# Altium PCB (OLD) BP and Sensors.PcbDoc
Units mm, origin at the board's own origin, x right, y up, seen from the top; angles counter-clockwise.
Board outline 99.2 x 114.2 mm, 2 copper layers (Top Layer, Bottom Layer); 83 components, 122 nets, 285 pads, 3 vias.
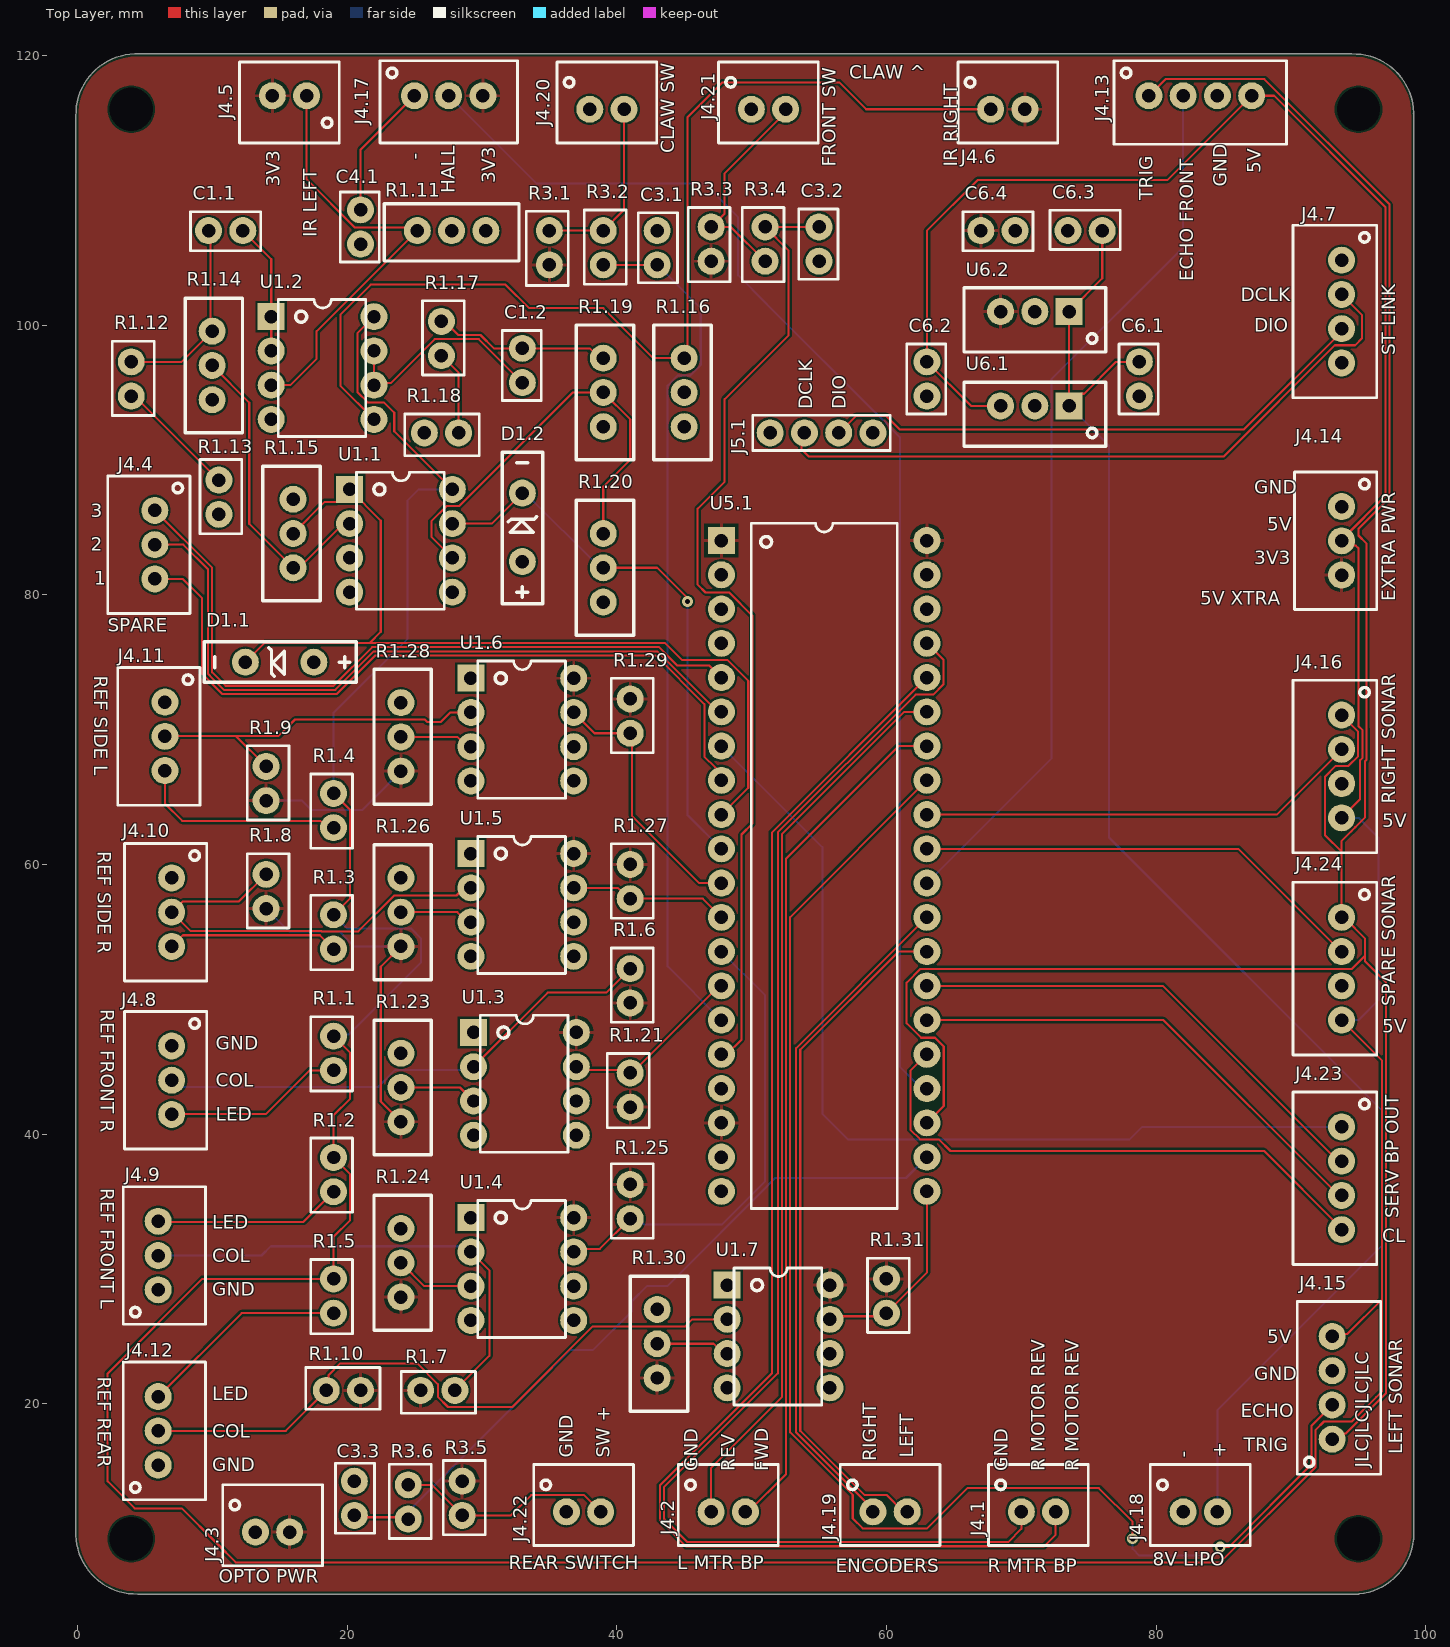
[diagram p0: Top Layer view]
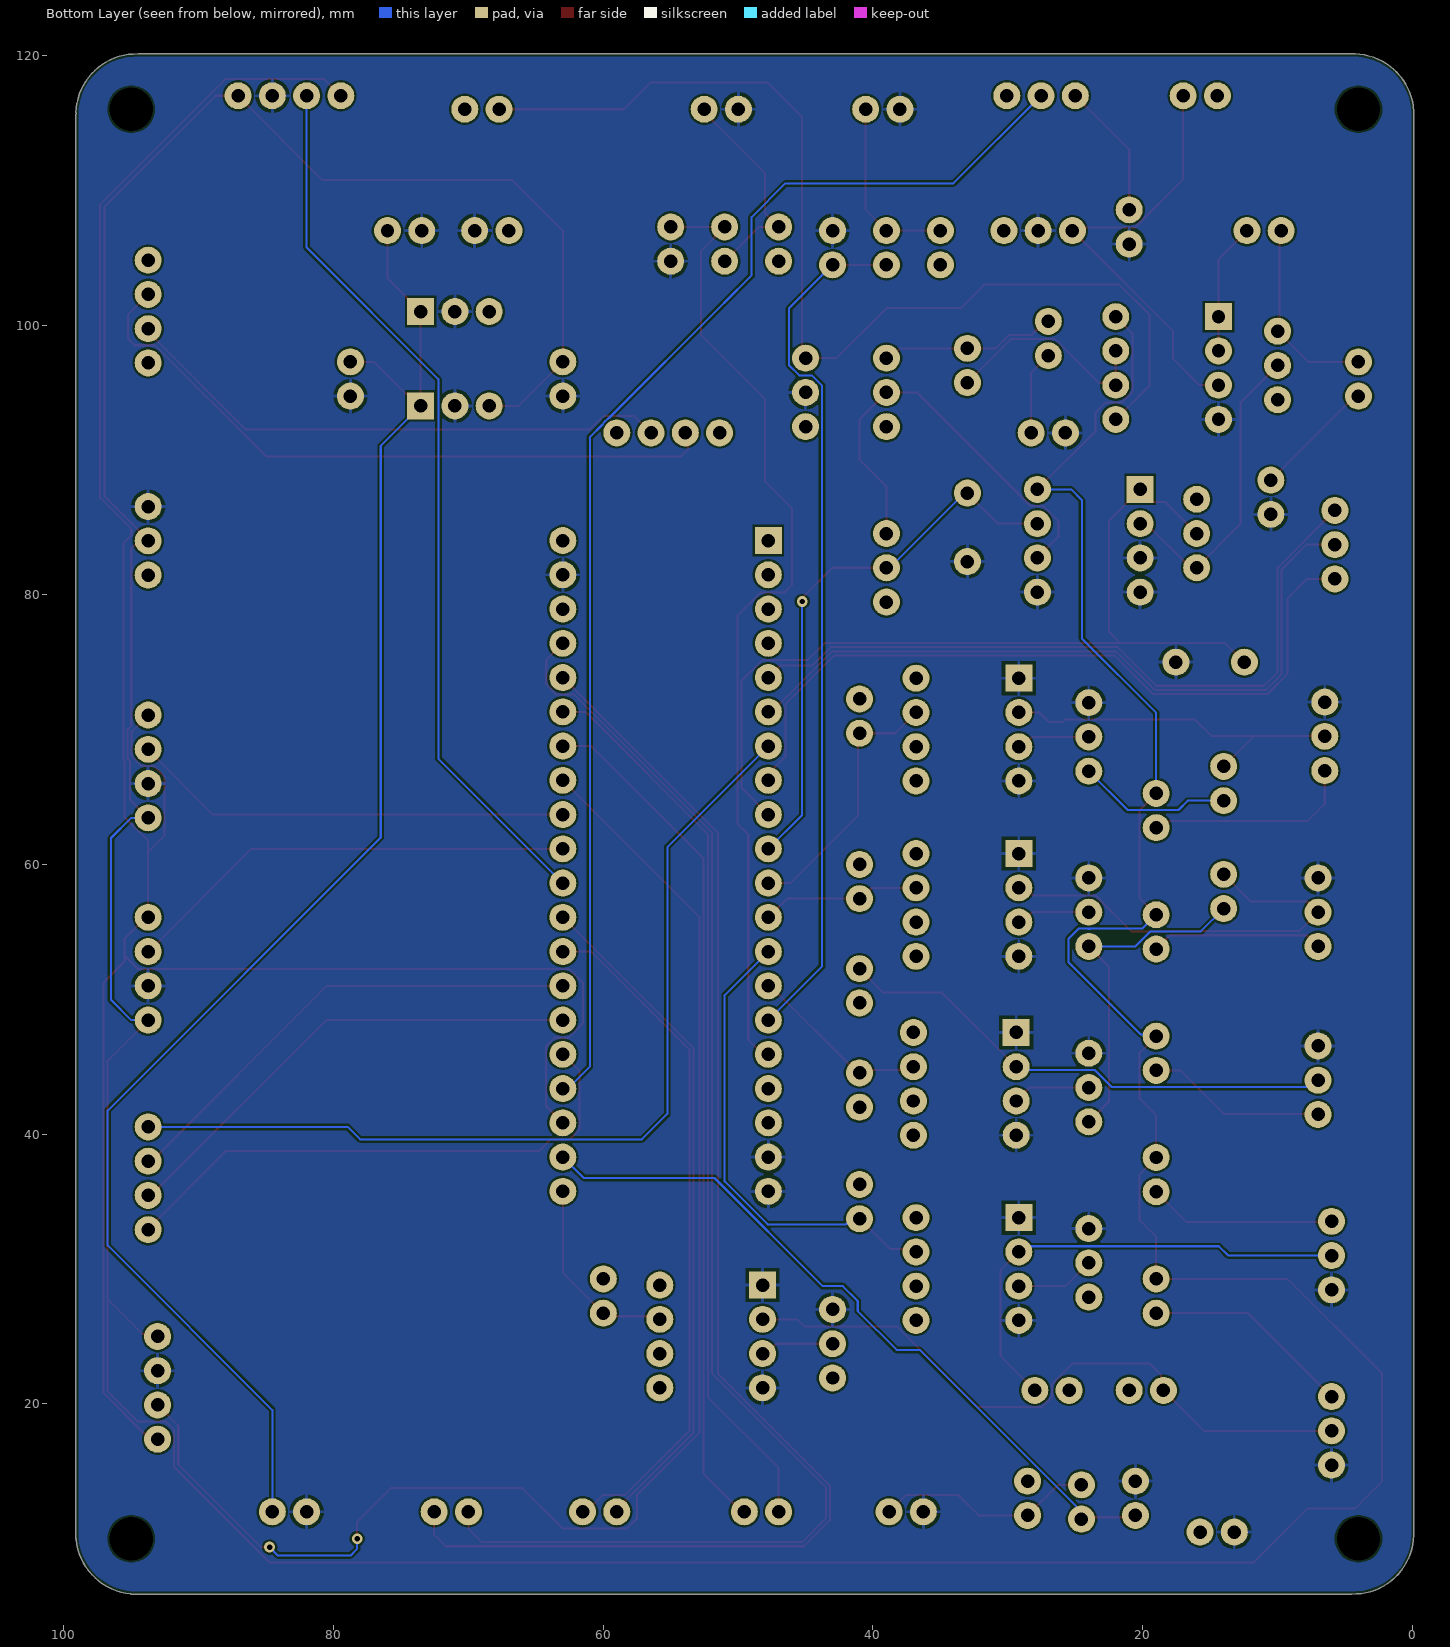
[diagram p1: Bottom Layer view, seen from below]

## Layer stack, top to bottom
Top Solder: solder mask 0.0102, Solder Resist, Dk 3.5
Top Layer: signal copper 0.0356
Dielectric 1: dielectric 0.32, FR-4, Dk 4.8
Bottom Layer: signal copper 0.0356
Bottom Solder: solder mask 0.0102, Solder Resist, Dk 3.5

## Board outline
-0.1,10.247 cw(c0,10.25) -0.1,10.25 -0.1,115.498 cw(c4.375,115.625) 4.247,120.1 cw(c4.25,120) 4.25,120.1 94.499,120.1 cw(c94.625,115.625) 99.1,115.753 cw(c99,115.75) 99.1,115.75 cw(c99,115.75) 99.079,115.688 cw(c99,115.625) 99.1,115.625 99.1,10.501 ccw(c94.625,10.375) 99.1,10.503 99.1,10.501 cw(c94.625,10.375) 99.102,10.375 cw(c94.625,10.375) 99.1,10.249 99.1,10 cw(c99,10) 99.081,9.941 cw(c94.625,10.375) 95.059,5.919 cw(c95,6) 95,5.9 4.501,5.9 ccw(c4.375,10.375) 4.503,5.9 4.501,5.9 cw(c4.375,10.375)

## Design rules (kind name [scope] priority, off if disabled: settings)
BoardOutlineClearance [All] p1: gap=0.2 ignorepadtopadclearanceinfootprint=FALSE
Clearance [All] p1: gap=0.152 ignorepadtopadclearanceinfootprint=FALSE
HoleSize [All] p1: absolutevalues=TRUE maxlimit=100 minlimit=0.4 maxpercent=80.000 minpercent=20.000
PolygonConnect [All] p1: connectstyle=Relief reliefconductorwidth=0.254 reliefentries=4 polygonreliefangle="90 Angle" airgapwidth=0.254
RoutingVias [All] p1: holewidth=0.4 width=0.8 viastyle="Through Hole" minholewidth=0.4 minwidth=0.6 maxholewidth=100 maxwidth=100
SilkToSilkClearance [All] p1: silktosilkclearance=0
SilkToSolderMaskClearance [IsPad] p1: minsilkscreentomaskgap=0 clearancetoexposedcopper=TRUE
SolderMaskExpansion [All] p1: expansion=0.102 istentingtop=FALSE
Width [All] p1: maxlimit=100 minlimit=0.152 preferedwidth=0.152
27 further rules are at their usual default settings.

## Components (designator, comment, footprint, x,y, rotation, side; value= is the part's Value field where it differs from the comment)
C1.1 "470n" "Non Polarized Cap" 11,107 r180 top
C1.2 "470n" "Non Polarized Cap" 33,97 r90 top
C3.1 "100n" "Non Polarized Cap" 43,105.73 r270 top
C3.2 "100n" "Non Polarized Cap" 55,106 r90 top
C3.3 "100n" "Non Polarized Cap" 20.54,13 r270 top
C4.1 "10n" "Non Polarized Cap" 21,107.27 r90 top
C6.1 "470n" "Non Polarized Cap" 78.75,96 r90 top
C6.2 "100n" "Non Polarized Cap" 63,96 r90 top
C6.3 "470n" "Non Polarized Cap" 74.73,107 r0 top
C6.4 "100n" "Non Polarized Cap" 68.27,107 r180 top
D1.1 "3.3V" "Zener Generic" 15,75 r180 top
D1.2 "3.3V" "Zener Generic" 33,85 r90 top
J4.1 "Right Motor BP" "2pos JST" 71.27,12 r0 top
J4.2 "Right Motor BP" "2pos JST" 48.27,12 r0 top
J4.3 "Optocoupler Power, Gnd" "2pos JST" 14.48,10.5 r0 top
J4.4 "Spare BP Pins" "3pos JST" 5.75,83.71 r270 top
J4.5 "IR Left" "2pos JST" 15.73,117 r180 top
J4.6 "IR Right" "2pos JST" 69,116 r0 top
J4.7 "SWD BP" "4Pos JST" 93.75,101 r270 top
J4.8 "Front Right Reflectance" "3pos JST" 7,44 r270 top
J4.9 "Front Left Reflectance" "3pos JST" 6,31 r90 top
J4.10 "Side Right Reflectance" "3pos JST" 7,56.46 r270 top
J4.11 "Side Left Reflectance" "3pos JST" 6.5,69.5 r270 top
J4.12 "Rear Reflectance" "3pos JST" 6,18 r90 top
J4.13 "Sonar Front Middle" "4Pos JST" 83.27,117 r0 top
J4.14 "Extra Power" "3pos JST" 93.75,84 r270 top
J4.15 "Sonar Side Left" "4Pos JST" 93.05,21.19 r90 top
J4.16 "Sonar Side Right" "4Pos JST" 93.75,67.27 r270 top
J4.17 "Magnet Sensor" "3pos JST" 27.54,117 r0 top
J4.18 "8V Lipo" "2pos JST" 83.27,12 r0 top
J4.19 "Encoders" "2pos JST" 60.27,12 r0 top
J4.20 "Claw Microswitch" "2pos JST" 39.27,116 r0 top
J4.21 "Front Microswitch" "2pos JST" 51.25,116 r0 top
J4.22 "Rear Microswitch" "2pos JST" 37.54,12 r0 top
J4.23 "Servos" "4Pos JST" 93.75,36.73 r270 top
J4.24 "Sonar Spare" "4Pos JST" 93.75,52.27 r270 top
J5.1 "Debug" "Four Pads" 55.19,92 r180 top
R1.1 "100" Res_Generic 19,46 r270 top
R1.2 "100" Res_Generic 19,37 r270 top
R1.3 "100" Res_Generic 19,55 r270 top
R1.4 "100" Res_Generic 19,64 r270 top
R1.5 "100" Res_Generic 19,28 r270 top
R1.6 "47k" Res_Generic 41,51 r90 top
R1.7 "47k" Res_Generic 26.73,21 r0 top
R1.8 "47k" Res_Generic 14,58 r90 top
R1.9 "47k" Res_Generic 14,66 r90 top
R1.10 "47k" Res_Generic 19.73,21 r180 top
R1.11 "100k" "Pot Generic" 27.75,107 r180 top
R1.12 "100" Res_Generic 4,96 r90 top
R1.13 "100" Res_Generic 10.5,87.23 r90 top
R1.14 "10k" "Pot Generic" 10,97 r270 top
R1.15 "100k" "Pot Generic" 16,84.54 r90 top
R1.16 "100k" "Pot Generic" 45,95 r90 top
R1.17 "100" Res_Generic 27,99 r90 top
R1.18 "100" Res_Generic 27,92 r0 top
R1.19 "10k" "Pot Generic" 39,95 r270 top
R1.20 "100k" "Pot Generic" 39,82 r270 top
R1.21 "10k" Res_Generic 41,43.27 r270 top
R1.23 "10k" "Pot Generic" 24,43.46 r270 top
R1.24 "10k" "Pot Generic" 24,30.46 r270 top
R1.25 "10k" Res_Generic 41,35 r90 top
R1.26 "10k" "Pot Generic" 24,56.46 r270 top
R1.27 "10k" Res_Generic 41,58.73 r90 top
R1.28 "10k" "Pot Generic" 24,69.46 r270 top
R1.29 "10k" Res_Generic 41,71 r90 top
R1.30 "10k" "Pot Generic" 43,24.46 r270 top
R1.31 "10k" Res_Generic 60,28 r90 top
R3.1 "10k" Res_Generic 35,105.73 r270 top
R3.2 "1k" Res_Generic 39,105.73 r90 top
R3.3 "10k" Res_Generic 47,106 r270 top
R3.4 "1k" Res_Generic 51,106 r270 top
R3.5 "10k" Res_Generic 28.54,13 r90 top
R3.6 "1k" Res_Generic 24.54,12.73 r90 top
U1.1 "TL082IP" DIP8 24,84 r0 top
U1.2 "TL082IP" DIP8 18.19,96.81 r0 top
U1.3 "LM311" DIP8 33.19,43.73 r0 top
U1.4 "LM311" DIP8 33,30 r0 top
U1.5 "LM311" DIP8 33,57 r0 top
U1.6 "LM311" DIP8 33,70 r0 top
U1.7 "LM311" DIP8 52,25 r0 top
U5.1 "Bluepill" DIP40 55.38,59.89 r0 top
U6.1 "5V XTRA" TO220 71,94 r180 top
U6.2 "UA78M33" TO220 71,101 r180 top

## Footprints (in the part's own frame and the unit in brackets; to place one, negate y for a bottom-side part, rotate by r counter-clockwise, add the part's x,y. Pads: shape width x height; smd on the part's side, far side on the other; paste and mask are expansions set on the pad)
"2pos JST" [mm]
  round 2 hole 1: 1(-1.27,0) 2(1.27,0)
  silkscreen extent -3.7,-2.5 3.7,3.5, body extent -3.7,-2.4 3.7,3.35, height 7.01
"3pos JST" [mm]
  round 2 hole 1: 1(-2.54,0) 2(0,0) 3(2.54,0)
  silkscreen extent -5.1,-3.5 5.1,2.6, body extent -4.95,-3.35 4.95,2.4, height 7
"4Pos JST" [mm]
  round 2 hole 1: 1(-3.81,0) 2(-1.27,0) 3(1.27,0) 4(3.81,0)
  silkscreen extent -6.4,-3.6 6.4,2.6, body extent -6.2,-3.38 6.2,2.37, height 7.01
DIP8 [mm]
  rect 2x2 hole 1: 1(-3.81,3.81)
  round 2 hole 1: 2(-3.81,1.27) 3(-3.81,-1.27) 4(-3.81,-3.81) 5(3.81,-3.81) 6(3.81,-1.27) 7(3.81,1.27) 8(3.81,3.81)
  silkscreen extent -3.3,-5.08 3.2,5.08, body extent -3.96,-4.79 3.91,4.79, height 5.33
DIP40 [mm]
  rect 2x2 hole 1: 1(-7.62,24.13)
  round 2 hole 1: 2(-7.62,21.59) 3(-7.62,19.05) 4(-7.62,16.51) 5(-7.62,13.97) 6(-7.62,11.43) 7(-7.62,8.89) 8(-7.62,6.35) 9(-7.62,3.81) 10(-7.62,1.27) 11(-7.62,-1.27) 12(-7.62,-3.81) 13(-7.62,-6.35) 14(-7.62,-8.89) 15(-7.62,-11.43) 16(-7.62,-13.97) 17(-7.62,-16.51) 18(-7.62,-19.05) 19(-7.62,-21.59) 20(-7.62,-24.13) 21(7.62,-24.13) 22(7.62,-21.59) 23(7.62,-19.05) 24(7.62,-16.51) 25(7.62,-13.97) 26(7.62,-11.43) 27(7.62,-8.89) 28(7.62,-6.35) 29(7.62,-3.81) 30(7.62,-1.27) 31(7.62,1.27) 32(7.62,3.81) 33(7.62,6.35) 34(7.62,8.89) 35(7.62,11.43) 36(7.62,13.97) 37(7.62,16.51) 38(7.62,19.05) 39(7.62,21.59) 40(7.62,24.13)
  silkscreen extent -5.42,-25.4 5.42,25.4, body extent -8.7,-25.67 8.8,25.63, height 4.71
"Four Pads" [mm]
  round 2 hole 1: 1(-3.81,0) 2(-1.27,0) 3(1.27,0) 4(3.81,0)
  silkscreen extent -5.1,-1.3 5.1,1.3
"Non Polarized Cap" [mm] "Cap Generic THT"
  round 2 hole 1: 1(-1.27,0) 2(1.27,0)
  silkscreen extent -2.6,-1.4 2.6,1.5, body extent -2,-1.2 2,1.3, height 6
"Pot Generic" [mm]
  round 2 hole 1: 1(-2.54,0) 2(0,0) 3(2.54,0)
  silkscreen extent -5,-2 5,2.25, body extent -4.89,-1.86 4.89,2.15, height 11.41
Res_Generic [mm] "Cap Generic THT Footprint"
  round 2 hole 1: 1(-1.27,0) 2(1.27,0)
  silkscreen extent -2.71,-1.7 2.8,1.4, body extent -1.47,-1.3 2.4,1, height 8.18
TO220 [mm]
  rect 2x2 hole 1: 1(-2.54,0)
  round 2 hole 1: 2(0,0) 3(2.54,0)
  silkscreen extent -5.25,-1.75 5.25,3, body extent -5.08,-1.66 5.08,2.91, height 19.6
"Zener Generic" [mm]
  round 2 hole 1: 1(-2.54,0) 2(2.54,0)
  silkscreen extent -5.68,-1.5 5.58,1.5, body extent -3.12,-1.86 4.37,1.86, height 11.55

## Part data
C1.1 C1.2 C3.1 C3.2 C3.3 C4.1 C6.1 C6.2 C6.3 C6.4: library part Cap_Generic
D1.1 D1.2: library part Zener_Generic
J4.1 J4.2 J4.3 J4.5 J4.6 J4.18 J4.19 J4.20 J4.21 J4.22: library part "2pos Conn", "2pos Conn JST"
J4.4 J4.8 J4.9 J4.10 J4.11 J4.12 J4.14 J4.17: library part "3pos Conn", "3pos Conn"
J4.7 J4.13 J4.15 J4.16 J4.23 J4.24: library part "4pos Conn", "4pos Conn"
J5.1: library part "BP SWD Conn"
R1.1 R1.2 R1.3 R1.4 R1.5 R1.6 R1.7 R1.8 R1.9 R1.10 R1.12 R1.13 R1.17 R1.18 R1.21 R1.25 R1.27 R1.29 R1.31 R3.1 R3.2 R3.3 R3.4 R3.5 R3.6: library part Res_Generic
R1.11 R1.14 R1.15 R1.16 R1.19 R1.20 R1.23 R1.24 R1.26 R1.28 R1.30: library part Pot_Generic
U1.1 U1.2: library part "TL082IP Op Amp", "TL082IP IC OPAMP JFET 2 CIRCUIT 8DIP", Supplier Part Number 1=595-TL082IP, Supplier 1=Mouser
U1.3 U1.4 U1.5 U1.6 U1.7: library part "LM311 Comparator", "LM311 IC DIFF COMPARATOR STROBE 8-DIP", Supplier Part Number 1=595-LM311P, Supplier 1=Mouser
U5.1: "STM32F103C8T6"
U6.1: library part "UA7805 5V Reg", "UA7805 IC REG LINEAR 5V 1.5A TO220-3", Supplier Part Number 1=296-39515-5-ND, Supplier 1=Digi-Key
U6.2: library part "UA78M33CKCS 3.3V Reg", "UA78M33 IC REG LINEAR 3.3V 500MA TO220-3", Supplier Part Number 1=595-UA78M33CKCS, Supplier 1=Mouser

## Free pads (board coordinates)
  round 0 hole 3.2: ""(4,10) ""(4,116) ""(95,10) ""(95,116)

## Via types
v1: diameter 0.8, hole 0.4, Top Layer to Bottom Layer, tented both sides, 3 vias

## Nets (pads, with @x,y where several pads share a name; then routed paths per layer and width w, separated by ;. In a path a pad name is that pad's centre, name@x,y a point inside that pad or via, vN(x,y) a via of type N, cw(c..) or ccw(c..) an arc to the next point about the centre after c; other vN are vias at no path point)
3.3V_P: C6.4.2 J4.3.2 J4.5.2 J4.6.2 J4.14.3 J4.17.3 R1.6.1 R1.7.1 R1.8.1 R1.9.1 R1.10.1 R1.21.2 R1.23.3 R1.24.3 R1.25.2 R1.26.3 R1.27.2 R1.28.3 R1.29.2 R1.30.3 R1.31.2 R3.1.2 R3.3.2 R3.5.2 U1.3.8 U1.4.8 U1.5.8 U1.6.8 U1.7.8 U5.1.1 U5.1.18 U5.1.40 U6.2.3 | length 36.9
  Top Layer w0.152: R1.23.3 22.5,42.42 22.5,52.42 R1.26.3
  Bottom Layer w0.152: R1.8.1 15.689,55.041 19.426,55.041 20.548,53.92 R1.26.3 ; R1.9.1 16.66,64.73 17.349,64.041 21.121,64.041 R1.28.3
5V_ARM: 
5V_P: C6.2.2 J4.13.4 J4.14.2 J4.15.4 J4.16.4 J4.24.4 R1.1.1 R1.2.1 R1.3.1 R1.4.1 R1.5.1 U1.1.8 U1.2.8 U6.1.3 | length 383.5
  Top Layer w0.152: R1.1.1 20.229,46.041 20.229,42.619 19,41.39 R1.2.1 20.229,37.041 20.229,33.619 19,32.39 R1.5.1 9.27,29.27 2.25,22.25 2.25,14.25 4.25,12.25 7.75,12.25 10.355,9.645 11.75,8.25 84.75,8.25 91.821,15.321 91.821,18.071 92.441,18.691 94.51,18.691 96.319,20.5 96.75,20.931 96.75,27.75 ; R1.3.1 20.229,57.499 20.229,64.041 R1.4.1 ; U1.2.8 20.771,99.391 20.771,95.031 21.537,94.266 22.734,94.266 23.5,93.5 23.5,92.12 U1.1.8 ; U6.1.3 66.27,94 C6.2.2 63,107 66.75,110.75 80.83,110.75 J4.13.4 88.75,117 97,108.75 97,87.319 J4.14.2@93.966,84.284 ; J4.15.4@92.582,25.189 94.189,25.189 96.75,27.75 ; J4.24.4 93.75,48.457 96.75,45.457 96.75,27.75 ; J4.16.4 95.106,64.816 95.106,67.71 95.283,67.887 95.283,69.978 95,70.261 95,83.45 94.803,83.646 94.603,83.646 J4.14.2@93.966,84.284 ; J4.14.2@93.75,84.7 93.75,84.5 J4.14.2@93.966,84.284 ; J4.14.2@93.812,83.95 93.966,84.103 J4.14.2@93.966,84.284
  Bottom Layer w0.152: R1.1.1 19.119,47.389 20.139,47.389 25.5,52.75 25.5,54.5 24.75,55.25 24.213,55.25 cw(c24,56.46) 23.787,55.25 20.02,55.25 R1.3.1 ; R1.4.1 19,71.25 24.5,76.75 24.5,87 25.31,87.81 U1.1.8 ; J4.24.4 95,48.46 96.5,49.96 96.5,61.96 95,63.46 J4.16.4
5V_SERVO: 
8V: C6.1.2 C6.3.2 J4.18.2 U6.1.1 U6.2.1 | length 117.3
  Top Layer w0.152: C6.3.2 76,103.46 U6.2.1 U6.1.1 74.444,94.904 74.654,94.904 77.02,97.27 C6.1.2
  Bottom Layer w0.152: U6.1.1 76.5,91.04 76.5,62 96.75,41.75 96.75,31.75 84.54,19.54 J4.18.2
15V: 
ARM_SERV_BP_IN: 
ARM_SERV_BP_OUT: J4.23.3 U5.1.26 | length 36.1
  Top Layer w0.152: U5.1.26 80.54,48.46 93.54,35.46 J4.23.3
ARM_SERV_PWM: 
BOX_SERV_BP_IN: 
BOX_SERV_BP_OUT: J4.23.1 U5.1.7 | length 69.8
  Bottom Layer w0.152: U5.1.7 55.25,61.29 55.25,41.5 57.139,39.611 78.031,39.611 78.96,40.54 J4.23.1@93.5,40.54
BOX_SERV_PWM: 
BRIDGE_SERV_BP_IN: 
BRIDGE_SERV_BP_OUT: J4.23.2 U5.1.27 | length 36.1
  Top Layer w0.152: U5.1.27 80.5,51 93.5,38 J4.23.2
BRIDGE_SERV_PWM: 
CLAW_SERV_BP_IN: 
CLAW_SERV_BP_OUT: J4.23.4 U5.1.25 | length 41.2
  Top Layer w0.152: U5.1.25 61.771,44.691 61.771,40.331 62.491,39.611 63.889,39.611 64.75,38.75 88,38.75 93.75,33 J4.23.4
CLAW_SERV_PWM: 
DCLK: J4.7.2 J5.1.3 | length 50.6
  Top Layer w0.152: J5.1.3 53.702,91.782 53.702,90.798 54.25,90.25 85,90.25 93.25,98.5 94.75,98.5 95.25,99 95.25,100.75 J4.7.2@93.75,102.25
DIO: J4.7.3 J5.1.2 | length 41.5
  Top Layer w0.152: J5.1.2 57.71,93.25 60,93.25 61,92.25 86.5,92.25 93.75,99.5 J4.7.3
ECHO_F_M: J4.13.2 U5.1.30 | length 66.3
  Bottom Layer w0.152: U5.1.30 72.229,67.849 72.229,95.979 82,105.75 J4.13.2
ECHO_S_L: J4.15.2 U5.1.33 | length 107.5
  Top Layer w0.152: U5.1.33 52.86,56.1 52.86,17.89 57.5,13.25 57.5,11.5 58.229,10.771 63.021,10.771 66,13.75 75.75,13.75 78.25,11.25 v1(78.25,10) ; v1(84.744,9.379) 84.747,9.382 85.372,9.382 91.517,15.526 91.517,18.387 J4.15.2
  Bottom Layer w0.152: v1(78.25,10) 78.25,9.25 78.747,8.753 84.118,8.753 v1(84.744,9.379)
ECHO_S_R: J4.16.2 U5.1.32 | length 32.8
  Top Layer w0.152: U5.1.32 88.95,63.7 93.75,68.5 J4.16.2
ECHO_SPARE: J4.24.2 U5.1.31 | length 33.9
  Top Layer w0.152: U5.1.31 86.09,61.16 93.71,53.54 J4.24.2
ENCODER_L: J4.19.2 U5.1.28 | length 51.1
  Top Layer w0.152: J4.19.2 61.25,12 60,13.25 58.362,13.25 53.61,18.003 53.61,46.259 60.891,53.54 U5.1.28
ENCODER_R: J4.19.1 U5.1.29 | length 50.5
  Top Layer w0.152: J4.19.1 59,12.181 53.305,17.876 53.305,46.385 U5.1.29
IR_LEFT_TRANS: J4.5.1 R1.11.3 U1.2.3 | length 32.8
  Top Layer w0.152: U1.2.3 15.79,95.54 17.75,97.5 17.75,99.54 R1.11.3 24.981,107.229 20.574,107.229 17,110.802 J4.5.1
IR_RIGHT_TRANS: J4.6.1 R1.16.3 U1.2.5 | length 79.8
  Top Layer w0.152: U1.2.5 19.5,95.5 19.5,100.75 21.75,103 31.75,103 33.5,101.25 39,101.25 42.71,97.54 R1.16.3 45.25,97.79 45.25,115.411 47.839,118 56.49,118 58.49,116 J4.6.1
IR_SNS_LEFT: D1.1.2 R1.15.2 U1.1.1 U5.1.9 | length 68
  Top Layer w0.152: D1.1.2 13.874,76.414 20.414,76.414 21.664,76.414 ; R1.15.2 18.346,86.886 19.266,86.886 U1.1.1 22.5,85.5 22.5,77.25 21.664,76.414 ; U5.1.9 49.75,65.69 49.75,73.608 48.186,75.171 44.829,75.171 43.586,76.414 21.664,76.414
IR_SNS_RIGHT: D1.2.2 R1.20.2 U1.1.7 U5.1.10 | length 41.5
  Top Layer w0.152: U1.1.7 30.73,85.27 D1.2.2 D1.2.2@33.23,87.54 ; R1.20.2 43,82 45.126,79.874 45.126,79.624 v1(45.25,79.5)
  Bottom Layer w0.152: D1.2.2 33.23,87.54 38.77,82 R1.20.2 ; v1(45.25,79.5) 45.25,63.67 U5.1.10
LEFT+: 
LEFT-: 
LEFT_FWD: 
LEFT_FWD_BP_IN: 
LEFT_FWD_BP_OUT: J4.2.2 U5.1.34 | length 63.7
  Top Layer w0.152: J4.2.2 49.75,12 52.555,14.805 52.555,60.444 60.891,68.78 U5.1.34
LEFT_REV: 
LEFT_REV_BP_IN: 
LEFT_REV_BP_OUT: J4.2.1 U5.1.35 | length 67.2
  Top Layer w0.152: J4.2.1@47,11.686 47,15.25 52.25,20.5 52.25,62.25 61.32,71.32 U5.1.35
M_GND: 
MAGNET_SNS: J4.17.2 U5.1.24 | length 95.8
  Bottom Layer w0.152: J4.17.2 34.04,110.5 46.5,110.5 49,108 49,103.681 51.047,101.634 ; 51.048,101.634 51.093,101.588 59.575,93.106 59.621,93.06 cw(c59,92) 60.06,92.621 61,91.681 61,45.009 62.629,43.38 U5.1.24
NetC1.1_1: C1.1.1 U1.2.1 U1.2.2 | length 9.8
  Top Layer w0.152: C1.1.1 14.38,104.89 U1.2.1 U1.2.2
NetC1.1_2: C1.1.2 R1.12.2 R1.14.1 | length 14.5
  Top Layer w0.152: R1.12.2 7.73,97.27 R1.14.1 9.865,99.675 9.865,106.865 C1.1.2
NetC1.2_1: C1.2.1 U1.2.6 U1.2.7 | length 16.3
  Top Layer w0.152: U1.2.7 U1.2.6 22.156,95.696 23.229,95.696 26.491,98.959 29.771,98.959 C1.2.1
NetC1.2_2: C1.2.2 R1.17.2 R1.19.1 | length 13.1
  Top Layer w0.152: R1.17.2 27.243,100.27 28.25,99.263 29.898,99.263 30.891,98.27 C1.2.2 37.992,98.27 38.722,97.54 R1.19.1
NetC4.1_2: C4.1.2 J4.17.1 | length 10.1
  Top Layer w0.152: C4.1.2 21,113 J4.17.1
NetQ2.13_1: 
NetQ2.14_1: 
NetQ2.15_1: 
NetQ2.16_1: 
NetQ2.17_1: 
NetQ2.17_3: 
NetQ2.18_1: 
NetQ2.18_3: 
NetQ2.19_1: 
NetQ2.19_3: 
NetQ2.20_1: 
NetQ2.20_3: 
NetQ2.21_1: 
NetQ2.21_3: 
NetQ2.22_1: 
NetQ2.22_3: 
NetQ2.23_1: 
NetQ2.23_3: 
NetQ2.24_1: 
NetQ2.24_3: 
NetR1.12_1: R1.12.1 R1.13.2 | length 9.1
  Top Layer w0.152: R1.12.1 4.27,94.73 R1.13.2
NetR1.14_2: R1.14.2 R1.15.1 U1.1.2 | length 23
  Top Layer w0.152: R1.14.2 12.75,94.25 12.75,85.25 R1.15.1 16.46,82 19.73,85.27 U1.1.2
NetR1.17_1: R1.17.1 R1.18.2 | length 6.3
  Top Layer w0.152: R1.17.1 28.27,96.46 R1.18.2
NetR1.19_2: R1.19.2 R1.20.1 U1.1.6 | length 32.2
  Top Layer w0.152: U1.1.6 26.25,84.29 26.25,85.447 27.384,86.581 28.319,86.581 36.738,95 R1.19.2 41,93 41,90.02 39,88.02 R1.20.1
NetR1.23_2: R1.23.2 U1.3.3 | length 5.8
  Top Layer w0.152: R1.23.2 28.38,43.46 U1.3.3
NetR1.24_2: R1.24.2 U1.4.3 | length 5.9
  Top Layer w0.152: R1.24.2 25.73,28.73 U1.4.3
NetR1.26_2: R1.26.2 U1.5.3 | length 5.5
  Top Layer w0.152: R1.26.2 28.182,56.46 28.912,55.73 U1.5.3
NetR1.28_2: R1.28.2 U1.6.3 | length 5.5
  Top Layer w0.152: R1.28.2 28.183,69.46 28.913,68.73 U1.6.3
NetR1.30_2: R1.30.2 U1.7.3 | length 5.5
  Top Layer w0.152: R1.30.2 47.182,24.46 47.912,23.73 U1.7.3
NetR2.1_2: 
NetR2.2_2: 
NetR2.3_1: 
NetR2.4_1: 
NetR2.5_2: 
NetR2.6_2: 
NetR2.9_2: 
NetR2.10_2: 
NetR2.11_1: 
NetR2.12_1: 
NetR2.13_2: 
NetR2.14_2: 
NetR2.15_2: 
NetR2.16_1: 
P_GND: C3.1.1 C3.2.1 C3.3.1 C4.1.1 C6.1.1 C6.2.1 C6.3.1 C6.4.1 D1.1.1 D1.2.1 J4.3.1 J4.8.1 J4.9.1 J4.10.1 J4.11.1 J4.12.1 J4.13.3 J4.14.1 J4.15.3 J4.16.3 J4.18.1 J4.20.1 J4.21.1 J4.22.1 J4.24.3 R1.11.2 R1.13.1 R1.16.2 R1.18.1 R1.23.1 R1.24.1 R1.26.1 R1.28.1 R1.30.1 U1.1.3 U1.1.4 U1.1.5 U1.2.4 U1.3.1 U1.3.4 U1.4.1 U1.4.4 U1.5.1 U1.5.4 U1.6.1 U1.6.4 U1.7.1 U1.7.4 U5.1.19 U5.1.20 U5.1.39 U6.1.2 U6.2.2
REF_F_L_COL: J4.9.2 R1.7.2 U1.4.2 | length 35.5
  Top Layer w0.152: R1.7.2 30.56,23.56 30.56,29.9 U1.4.2
  Bottom Layer w0.152: J4.9.2 13.66,31 14.349,31.689 28.271,31.689 28.69,31.27 U1.4.2
REF_F_L_LED: J4.9.3 R1.2.2 | length 13.9
  Top Layer w0.152: J4.9.3@6,33.5 16.77,33.5 R1.2.2
REF_F_L_SNS: R1.25.1 U1.4.7 U5.1.13 | length 35.1
  Top Layer w0.152: U1.4.7 37.04,31.5 38.75,31.5 40.98,33.73 R1.25.1
  Bottom Layer w0.152: R1.25.1 41.354,33.376 41.95,33.376 42.013,33.313 47.813,33.313 51,36.5 51,50.3 U5.1.13
REF_F_R_COL: J4.8.2 R1.6.2 U1.3.2 | length 38.1
  Top Layer w0.152: U1.3.2@29.151,44.771 U1.3.2 34.88,50.5 39.23,50.5 R1.6.2
  Bottom Layer w0.152: J4.8.2@7.1,43.501 7,43.501 22.304,43.501 23.574,44.771 29.151,44.771 U1.3.2
REF_F_R_LED: J4.8.3 R1.1.2 | length 13.4
  Top Layer w0.152: J4.8.3 7.04,41.5 14,41.5 17.23,44.73 R1.1.2
REF_F_R_SNS: R1.21.1 U1.3.7 U5.1.14 | length 13.6
  Top Layer w0.152: U1.3.7 37.23,44.77 40.77,44.77 R1.21.1 41.15,44.54 47.61,51 U5.1.14
REF_R_COL: J4.12.2 R1.10.2 U1.7.2 | length 49.4
  Top Layer w0.152: J4.12.2 15.46,18 18.639,21.179 18.639,22.139 19.5,23 25.198,23 26.73,21.468 26.73,20.532 27.491,19.771 32.256,19.771 38.235,25.75 45.085,25.75 45.605,26.27 U1.7.2
REF_R_LED: J4.12.3 R1.5.2 | length 15.7
  Top Layer w0.152: J4.12.3@5.897,20.437 12.19,26.73 R1.5.2
REF_R_SNS: R1.31.1 U1.7.7 U5.1.21 | length 14.7
  Top Layer w0.152: U1.7.7 56.04,26.5 59.77,26.5 63,29.73 U5.1.21
REF_S_L_COL: J4.11.2 R1.9.2 U1.6.2 | length 26.5
  Top Layer w0.152: J4.11.2@6.25,69.5 J4.11.2 ; J4.11.2@7,69.54 14.93,69.54 16.14,70.75 25.75,70.75 25.937,70.563 26.96,70.563 27.667,71.27 U1.6.2 ; 11.77,69.5 R1.9.2
REF_S_L_LED: J4.11.3 R1.4.2 | length 15.7
  Top Layer w0.152: J4.11.3@6.46,67 J4.11.3 6.5,64.5 7.77,63.23 18,63.23 18.5,62.73 R1.4.2
REF_S_L_SNS: R1.29.1 U1.6.7 U5.1.11 | length 19.7
  Top Layer w0.152: U1.6.7 38.35,69.73 R1.29.1 41.125,69.605 41.125,63.625 46.13,58.62 U5.1.11
REF_S_R_COL: J4.10.2 R1.8.2 U1.5.2 | length 32.3
  Top Layer w0.152: 9.98,57.25 7.821,57.25 6.994,56.423 7.037,56.423 8.405,55.055 18.106,55.055 18.12,55.041 20.844,55.041 23.503,57.701 28.121,57.701 28.69,58.27 U1.5.2 ; 10,57.25 11.98,57.25 R1.8.2
REF_S_R_LED: J4.10.3 R1.3.2 | length 12.8
  Top Layer w0.152: J4.10.3 7.83,54.75 17.98,54.75 R1.3.2
REF_S_R_SNS: R1.27.1 U1.5.7 U5.1.12 | length 11.9
  Top Layer w0.152: U1.5.7 40.073,58.27 40.883,57.46 R1.27.1 46.38,57.46 U5.1.12
RIGHT+: 
RIGHT-: 
RIGHT_FWD: 
RIGHT_FWD_BP_IN: 
RIGHT_FWD_BP_OUT: J4.1.2 U5.1.36 | length 103.1
  Top Layer w0.152: U5.1.36 62.998,73.86 51.5,62.362 51.5,22.25 43.195,13.945 43.195,11.555 43.195,11.374 45.124,9.445 71.695,9.445 72.54,10.29 J4.1.2@72.54,12.207
RIGHT_REV: 
RIGHT_REV_BP_IN: 
RIGHT_REV_BP_OUT: J4.1.1 U5.1.37 | length 103.7
  Top Layer w0.152: U5.1.37 64.229,75.171 64.229,73.351 63.468,72.59 62.159,72.59 51.945,62.376 51.945,22.264 43.5,13.819 43.5,11.5 45.25,9.75 69.02,9.75 70,10.73 J4.1.1
SPARE_1: J4.4.3 U5.1.8 | length 56.4
  Top Layer w0.152: J4.4.3 7.83,81.17 9.25,79.75 9.25,74.138 10.748,72.64 19.253,72.64 22.112,75.5 42.888,75.5 46.5,71.888 46.5,68 47.294,67.206 47.76,66.74 U5.1.8
SPARE_2: J4.4.2 U5.1.6 | length 54.1
  Top Layer w0.152: J4.4.2 7.859,83.71 9.695,81.874 9.695,74.124 10.034,73.784 10.874,72.945 19.126,72.945 21.986,75.805 43.014,75.805 47.499,71.32 U5.1.6
SPARE_3: J4.4.1 U5.1.5 | length 54.1
  Top Layer w0.152: J4.4.1 10,82 10,74.25 11,73.25 11.063,73.25 19,73.25 21.86,76.11 43.14,76.11 44.5,74.75 46.87,74.75 U5.1.5
SW_CLAW_+: J4.20.2 R3.1.1 R3.2.2 | length 13.6
  Top Layer w0.152: R3.1.1 R3.2.2 40.54,108.54 J4.20.2
SW_CLAW_SNS: C3.1.2 R3.2.1 U5.1.15 | length 64.6
  Top Layer w0.152: R3.2.1 C3.1.2
  Bottom Layer w0.152: C3.1.2 46.229,101.231 46.229,97.031 45.468,96.27 44.532,96.27 43.771,95.509 43.771,52.449 U5.1.15
SW_FRONT_+: J4.21.2 R3.3.1 R3.4.2 | length 16.6
  Top Layer w0.152: R3.4.2 48.46,107.27 R3.3.1 48,108.27 48,111.25 52.52,115.77 J4.21.2@52.52,116.556
SW_FRONT_SNS: C3.2.2 R3.4.1 U5.1.16 | length 72.8
  Top Layer w0.152: U5.1.16 48.17,45.92 49.25,47 49.25,62.219 50.055,63.024 50.055,78.445 48.331,80.169 46.581,80.169 46,80.75 46,86.375 48,88.375 48,94.5 52.75,99.25 52.75,105.52 R3.4.1 C3.2.2
SW_REAR_+: J4.22.2 R3.5.1 R3.6.2 | length 16.3
  Top Layer w0.152: R3.6.2 26.27,14 R3.5.1 32.16,11.73 33.659,13.229 37.581,13.229 J4.22.2
SW_REAR_SNS: C3.3.2 R3.6.1 U5.1.22 | length 54.4
  Top Layer w0.152: C3.3.2 20.675,11.595 24.405,11.595 R3.6.1
  Bottom Layer w0.152: R3.6.1 24.894,11.814 24.894,12.361 36.532,24 38.25,24 41.13,26.88 41.13,27.63 42.233,28.733 43.733,28.733 51.75,36.75 61.45,36.75 U5.1.22
TRIG_COM: J4.13.1 J4.15.1 J4.16.1 J4.24.1 U5.1.23 | length 179.1
  Top Layer w0.152: U5.1.23 64.25,42.09 64.25,46.5 63.601,47.149 62.574,47.149 61.5,48.222 61.5,51.237 62.512,52.25 94.5,52.25 95.5,53.25 ; J4.13.1 80.689,118.229 88.021,118.229 97.305,108.945 97.305,87.193 95,84.888 95,84.391 95.585,83.806 95.585,70.107 95.588,70.104 95.588,67.761 95.5,67.673 95.5,63.5 94.759,62.759 ; J4.15.1 93.55,17.38 93.976,17.806 94.056,17.806 97.055,20.805 97.055,51.248 95.5,52.803 95.5,53.25 ; J4.24.1 93.75,60.93 ; J4.16.1 94.979,69.851 94.979,68.031 94.259,67.311 93.324,67.311 92.521,66.509 92.521,62.159 93.75,60.93 ; J4.24.1@94,56 95.5,54.5 95.5,53.25 ; 94.773,62.745 94.479,62.451 94.451,62.451 93.75,61.75 93.75,60.93
pads on no net: J4.7.1 J4.7.4 J5.1.1 J5.1.4 R1.11.1 R1.14.3 R1.15.3 R1.16.1 R1.19.3 R1.20.3 U1.3.5 U1.3.6 U1.4.5 U1.4.6 U1.5.5 U1.5.6 U1.6.5 U1.6.6 U1.7.5 U1.7.6 U5.1.2 U5.1.3 U5.1.4 U5.1.17 U5.1.38

## Polygon pours and split planes (outlines as drawn)
P_GND on Bottom Layer "Bottom Pour" (solid, remove dead copper, pour order 0): 0,120 99,120 99,6 0,6
3.3V_P on Top Layer "3V3 Pour" (solid, remove dead copper, pour order 2): 0,120 99,120 99,6 0,6

## Silkscreen, mask and mechanical layers (free items; w line width, h text height)
Top Overlay:
  text "CLAW ^" at 57.254,118.254 h1
  text "CLAW SW" at 44.246,112.754 h1 r90
  text "-" at 25.496,112.254 h1 r90
  text "FRONT SW" at 56.246,111.754 h1 r90
  text "IR RIGHT" at 65.25,111.75 h1 r90
  text "5V" at 87.746,111.254 h1 r90
  text "3V3" at 30.996,110.504 h1 r90
  text "3V3" at 14.996,110.254 h1 r90
  text "GND" at 85.246,110.254 h1 r90
  text "HALL" at 27.996,109.754 h1 r90
  text "TRIG" at 79.746,109.254 h1 r90
  text "IR LEFT" at 17.746,106.504 h1 r90
  text "ECHO FRONT" at 82.746,103.254 h1 r90
  text "DCLK" at 86.254,101.754 h1
  text "DIO" at 87.254,99.504 h1
  text "ST LINK" at 97.746,97.754 h1 r90
  text "DCLK" at 54.496,93.754 h1 r90
  text "DIO" at 56.996,93.754 h1 r90
  text "GND" at 87.254,87.504 h1
  text "3" at 1.004,85.754 h1
  text "5V" at 88.254,84.754 h1
  text "2" at 1.004,83.254 h1
  text "3V3" at 87.254,82.254 h1
  text "1" at 1.254,80.754 h1
  text "EXTRA PWR" at 97.746,79.504 h1 r90
  text "5V XTRA" at 83.254,79.254 h1
  text "SPARE" at 2.254,77.254 h1
  text "REF SIDE L" at 1.254,73.996 h1 r270
  text "RIGHT SONAR" at 97.746,64.504 h1 r90
  text "5V" at 96.754,62.754 h1
  text "REF SIDE R" at 1.504,60.996 h1 r270
  text "SPARE SONAR" at 97.746,49.504 h1 r90
  text "REF FRONT R" at 1.754,49.246 h1 r270
  text "5V" at 96.754,47.504 h1
  text "GND" at 10.254,46.254 h1
  text "COL" at 10.254,43.504 h1
  text "LED" at 10.254,41.004 h1
  text "REF FRONT L" at 1.754,35.996 h1 r270
  text "SERV BP OUT" at 97.996,33.754 h1 r90
  text "LED" at 10.004,33.004 h1
  text "CL" at 96.754,32.004 h1
  text "COL" at 10.004,30.504 h1
  text "GND" at 10.004,28.004 h1
  text "5V" at 88.254,24.504 h1
  text "REF REAR" at 1.504,21.996 h1 r270
  text "GND" at 87.254,21.754 h1
  text "LED" at 10.004,20.254 h1
  text "ECHO" at 86.254,19.004 h1
  text "COL" at 10.004,17.504 h1
  text "TRIG" at 86.504,16.504 h1
  text "LEFT SONAR" at 98.246,16.254 h1 r90
  text "GND" at 36.746,16.004 h1 r90
  text "SW +" at 39.496,16.004 h1 r90
  text "LEFT" at 61.996,16.004 h1 r90
  text "-" at 82.496,16.004 h1 r90
  text "+" at 85.163,16.004 h1 r90
  text "RIGHT" at 59.246,15.754 h1 r90
  text "JLCJLCJLCJLC" at 95.746,15.254 h1 r90
  text "GND" at 10.004,15.004 h1
  text "GND" at 45.996,15.004 h1 r90
  text "REV" at 48.746,15.004 h1 r90
  text "FWD" at 51.246,15.004 h1 r90
  text "GND" at 68.996,15.004 h1 r90
  text "R MOTOR REV" at 71.746,15.004 h1 r90
  text "R MOTOR REV" at 74.246,15.004 h1 r90
  text "8V LIPO" at 79.754,8.004 h1
  text "REAR SWITCH" at 32.004,7.754 h1
  text "L MTR BP" at 44.504,7.754 h1
  text "ENCODERS" at 56.254,7.504 h1
  text "R MTR BP" at 67.504,7.504 h1
  text "OPTO PWR" at 10.504,6.754 h1
Mechanical 1:
  lines w0.2: 0,115.5 cw(c4.375,115.625) 4.25,120 94.501,119.999 cw(c94.626,115.626) 98.999,115.751 99,115.75 ; 0,115.75 0,10.25 ccw(c4.375,10.375) 4.5,6 ; 4.25,6 95,6 ; 94.75,6 ccw(c94.625,10.375) 99,10.5 ; 99,10 99,115.625